# Altium PCB 电磁阀驱动板 V0.1.PcbDoc
Units mil, origin at the board's own origin, x right, y up, seen from the top; angles counter-clockwise.
Board outline 2165.35 x 2165 mil, 2 copper layers (Top Layer, Bottom Layer); 70 components, 47 nets, 188 pads, 19 vias.
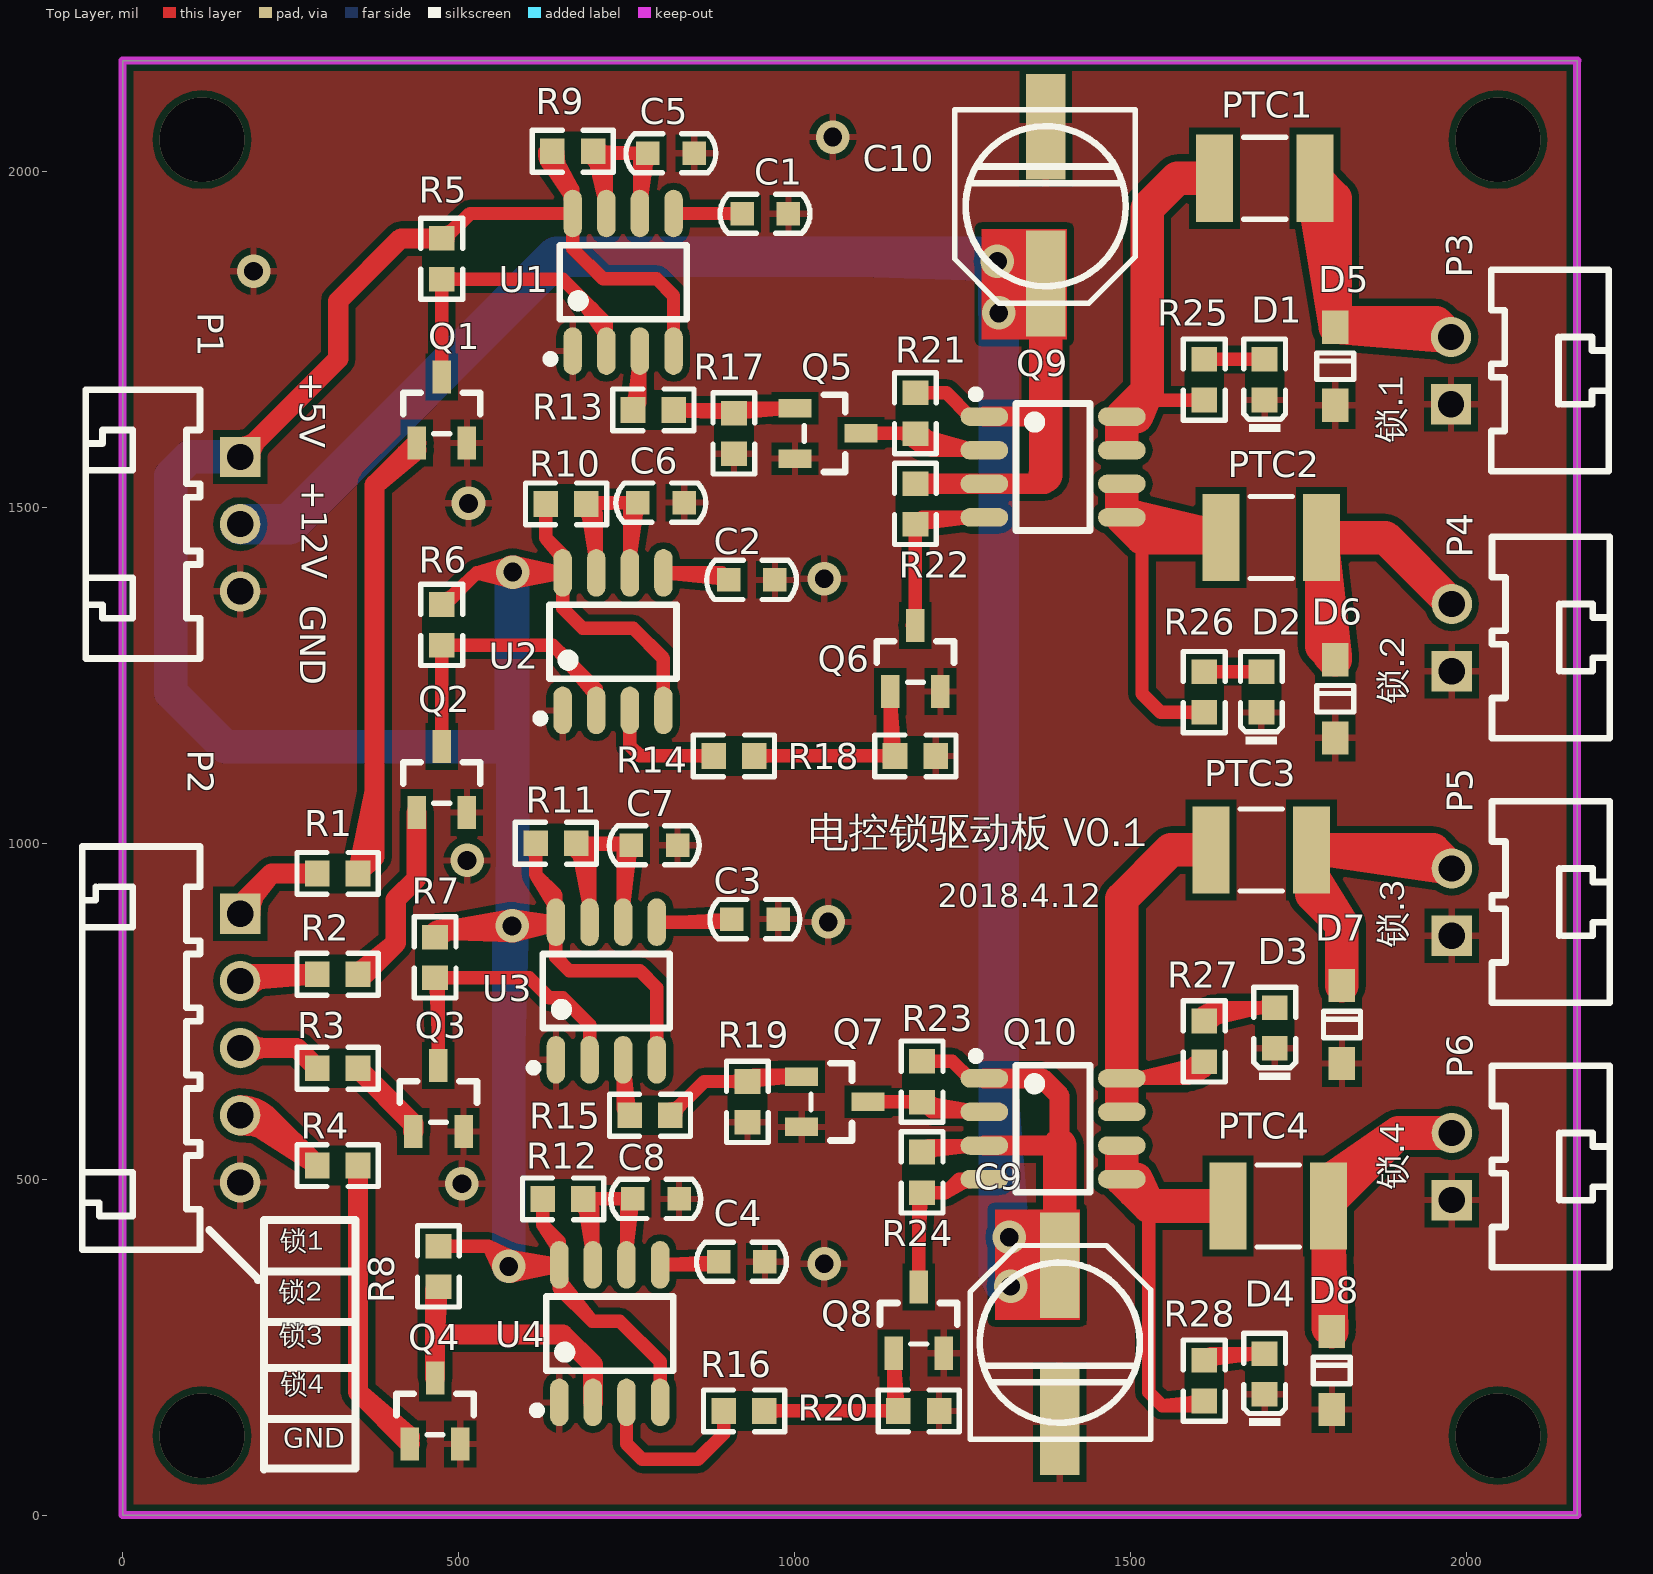
[diagram p0: Top Layer view]
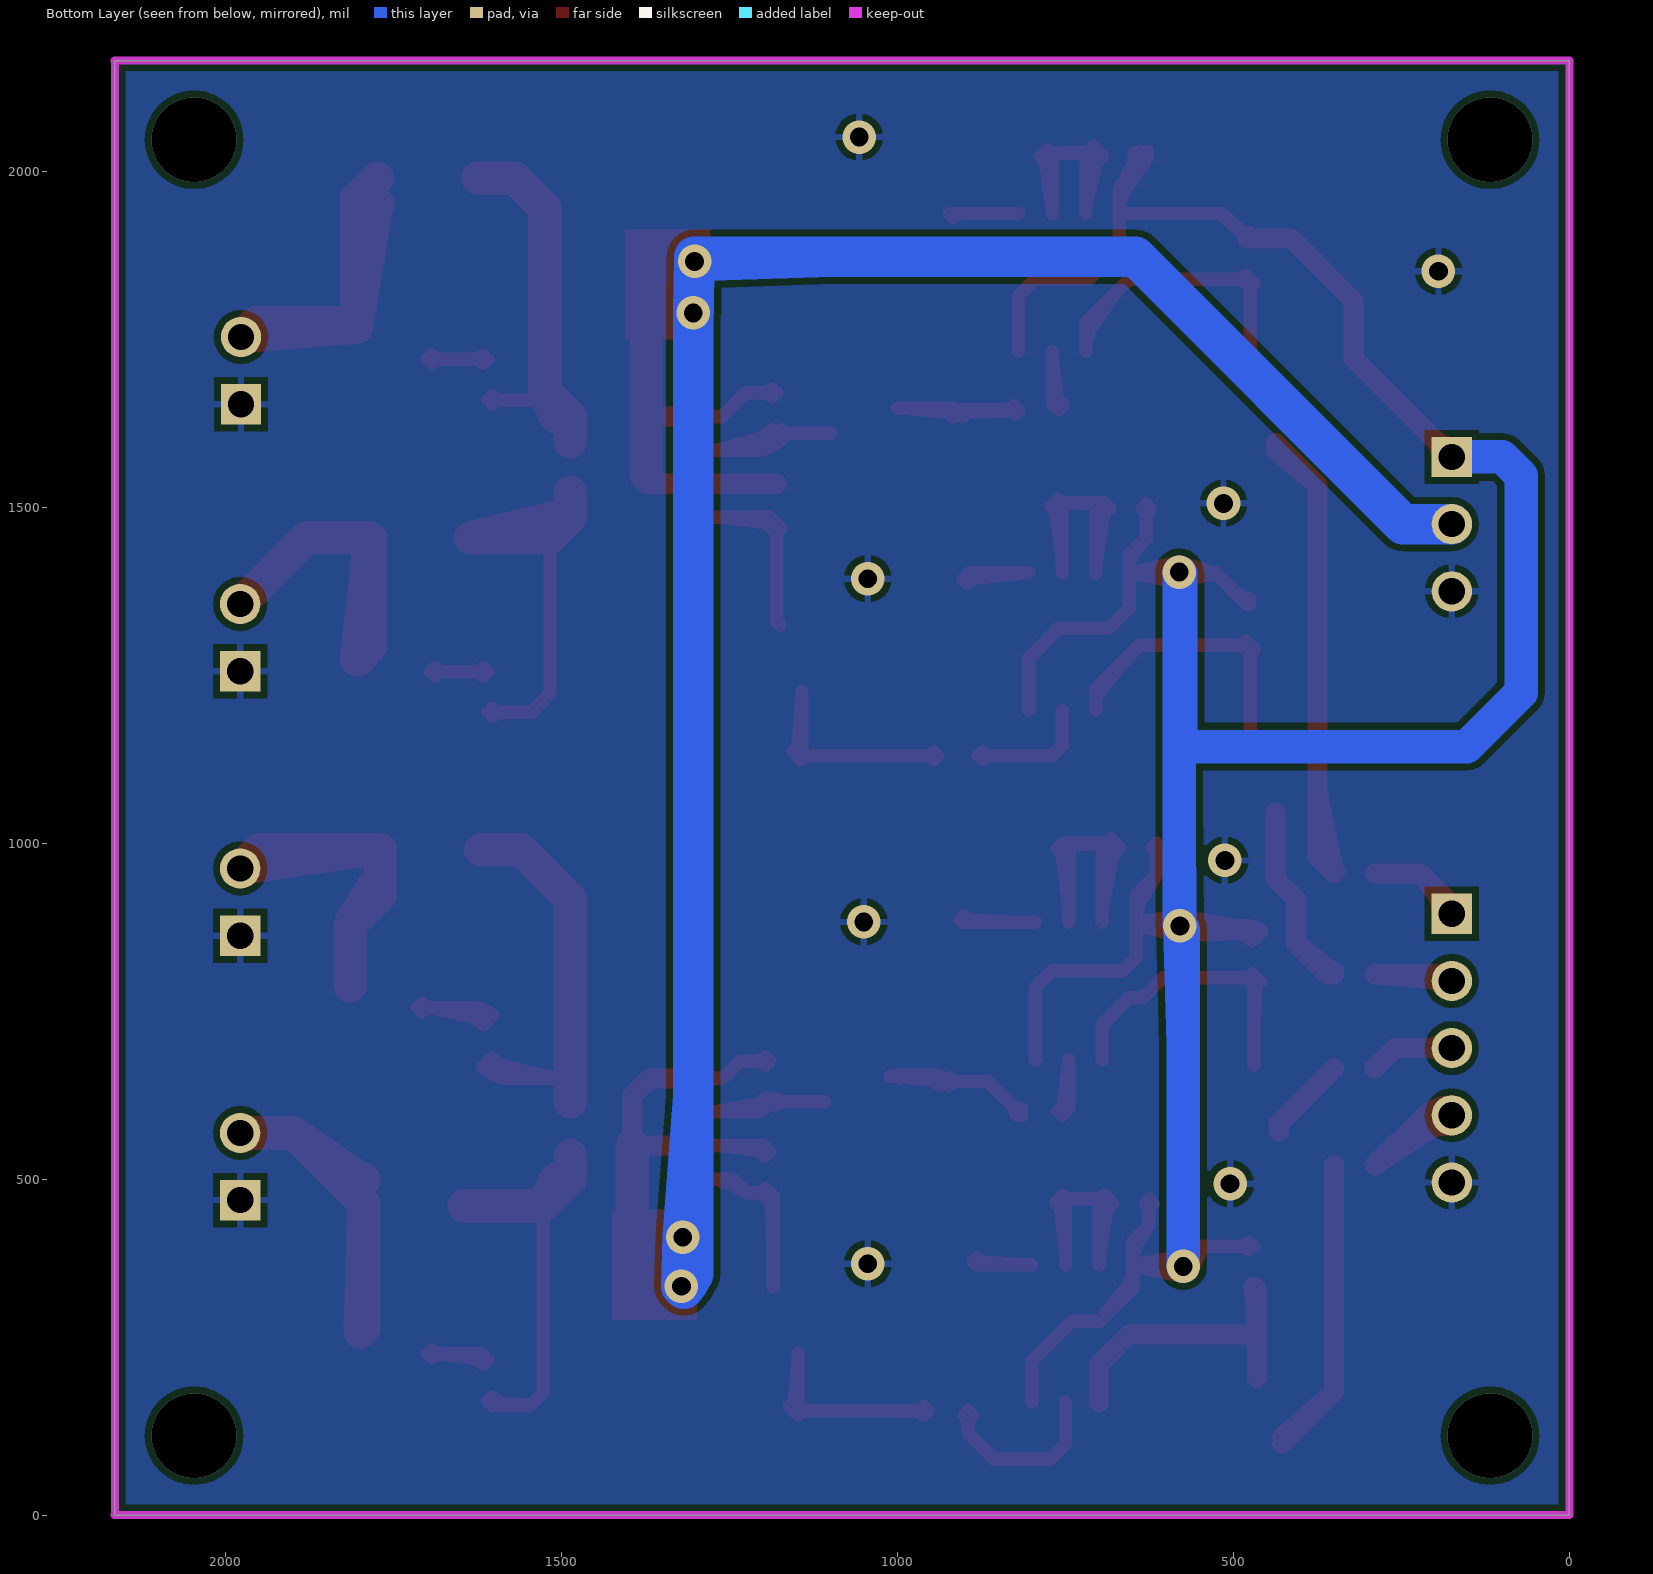
[diagram p1: Bottom Layer view, seen from below]
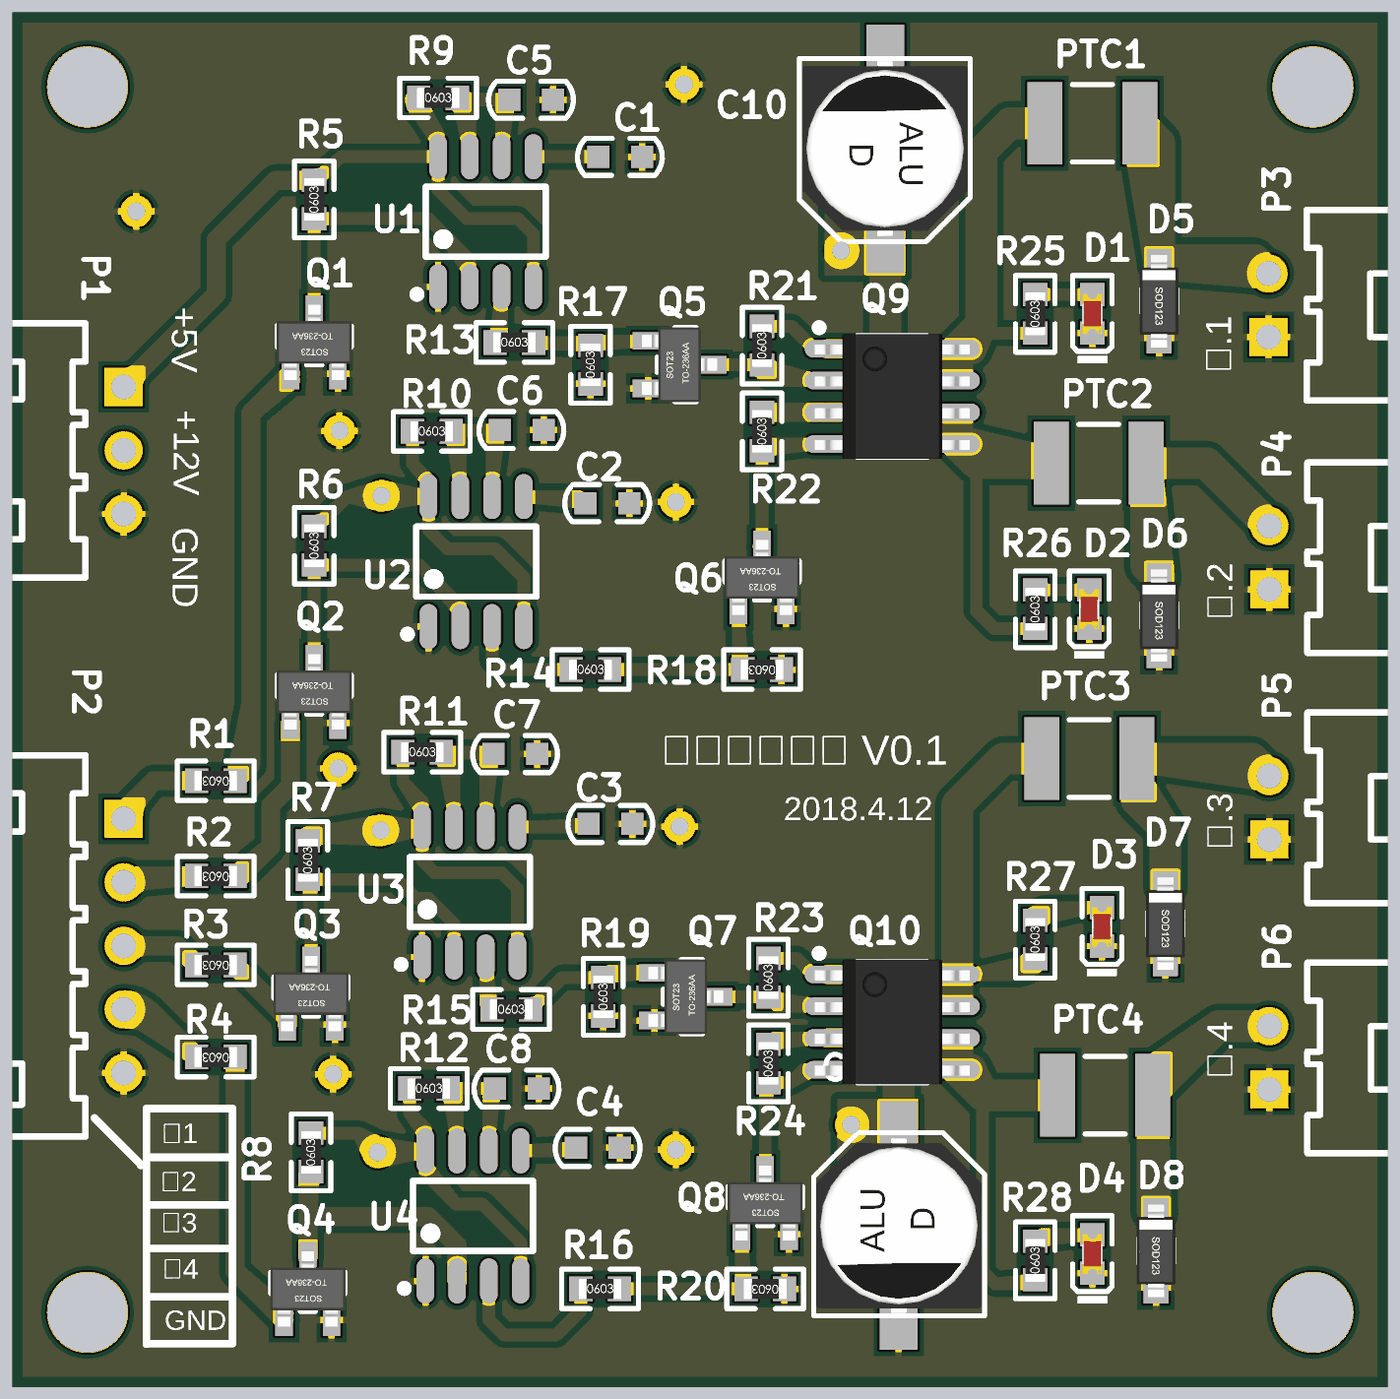
[diagram p2: 3D render of the assembled board from above, using the file's embedded part models]

## Layer stack, top to bottom
Top Layer: signal copper 1.4
Dielectric: dielectric 12.6, FR-4, Dk 4.8
Bottom Layer: signal copper 1.4

## Board outline
0,2165 2165,2165 2165,0.35 2165.35,0 0,0

## Design rules (kind name [scope] priority, off if disabled: settings)
Clearance [All] p1: gap=10
PolygonConnect [All] p1: connectstyle=Relief reliefconductorwidth=10 reliefentries=4 polygonreliefangle="90 Angle"
RoomDefinition 电磁阀驱动 [InComponentClass('电磁阀驱动')] p1: confinementstyle=ConfineIn formatcopy=TRUE outline 0,0 2165,0 2165,2165 0,2165
RoutingVias [All] p1: holewidth=28 width=50 viastyle="Through Hole" minholewidth=28 minwidth=50 maxholewidth=28 maxwidth=50
SilkscreenOverComponentPads [All] p1: minsilkscreentomaskgap=10
SolderMaskExpansion [All] p1: expansion=4
Width [All] p1: maxlimit=1000 minlimit=10 preferedwidth=10
27 further rules are at their usual default settings.

## Components (designator, comment, footprint, x,y, rotation, side; value= is the part's Value field where it differs from the comment)
C1 "Cap" 0603C 955,1935 r180 top
C2 "Cap" 0603C 935,1390 r180 top
C3 "Cap" 0603C 940,885 r180 top
C4 "Cap" 0603C 920,375 r180 top
C5 "Cap" 0603C 815,2025 r180 top
C6 "Cap" 0603C 800,1505 r180 top
C7 "Cap" 0603C 790,995 r180 top
C8 "Cap" 0603C 792.32,468.5 r180 top
C9 "47uF 25v" CAP_SMD_6*7 1395,255 r0 top
C10 "47uF 25v" CAP_SMD_6*7 1374.02,1949.8 r180 top
D1 "绿灯 0603" 0603_LED_S1 1700,1690 r90 top
D2 "绿灯 0603" 0603_LED_S1 1695,1225 r90 top
D3 "绿灯 0603" 0603_LED_S1 1715,725 r90 top
D4 "绿灯 0603" 0603_LED_S1 1700,210 r90 top
D5 "B5819W  SL" SOD-123 1805,1710 r270 top
D6 "B5819W  SL" SOD-123 1805,1215 r270 top
D7 "B5819W  SL" SOD-123 1815,730 r270 top
D8 "B5819W  SL" SOD-123 1800,215 r270 top
P1 "Header 3" sip-3 175,1575 r270 top
P2 "Header 5" SIP-5 175,895 r270 top
P3 "Header 2" SIP-2 1977.36,1653.54 r90 top
P4 "Header 2" SIP-2 1978.5,1256.1 r90 top
P5 "Header 2" SIP-2 1978.5,862.4 r90 top
P6 "Header 2" SIP-2 1978.5,468.7 r90 top
PTC1 "SMD1812P300TF/16" 1812 1700,1990 r0 top
PTC2 "SMD1812P300TF/16" 1812 1710,1455 r0 top
PTC3 "SMD1812P300TF/16" 1812 1695,990 r0 top
PTC4 "SMD1812P300TF/16" 1812 1720,460 r0 top
Q1 "SS8050 Y1" SOT-23(SOT-23-3) 475,1645 r270 top
Q2 "SS8050 Y1" SOT-23(SOT-23-3) 475,1095 r270 top
Q3 "SS8050 Y1" SOT-23(SOT-23-3) 470,620 r270 top locked
Q4 "SS8050 Y1" SOT-23(SOT-23-3) 465,155 r270 top
Q5 "SS8050 Y1" SOT-23(SOT-23-3) 1050,1610 r180 top
Q6 "SS8050 Y1" SOT-23(SOT-23-3) 1180,1275 r270 top
Q7 "SS8050 Y1" SOT-23(SOT-23-3) 1060,615 r180 top
Q8 "SS8050 Y1" SOT-23(SOT-23-3) 1185,290 r270 top
Q9 "AO4803A" SOP-8_150mil 1385,1560 r270 top
Q10 "AO4803A" SOP-8_150mil 1385,575 r270 top
R1 "100Ω  ±1%" 0603_R 320,955 r180 top locked
R2 "100Ω  ±1%" 0603_R 320,805 r180 top locked
R3 "100Ω  ±1%" 0603_R 320,665 r180 top locked
R4 "100Ω  ±1%" 0603_R 320,520 r180 top locked
R5 "10KΩ (102) ±1%" 0603_R 475,1870 r90 top
R6 "10KΩ (102) ±1%" 0603_R 475,1325 r90 top
R7 "10KΩ (102) ±1%" 0603_R 465,830 r90 top
R8 "10KΩ (102) ±1%" 0603_R 470,370 r90 top
R9 "3KΩ (3001) ±1%" 0603_R 670,2030 r0 top locked
R10 "3KΩ (3001) ±1%" 0603_R 660,1505 r0 top locked
R11 "3KΩ (3001) ±1%" 0603_R 645,1000 r0 top locked
R12 "3KΩ (3001) ±1%" 0603_R 655.51,470.47 r0 top
R13 "3KΩ (3001) ±1%" 0603_R 790,1645 r0 top
R14 "3KΩ (3001) ±1%" 0603_R 910,1130 r0 top
R15 "3KΩ (3001) ±1%" 0603_R 785,595 r0 top
R16 "3KΩ (3001) ±1%" 0603_R 925,155 r0 top
R17 "10KΩ (102) ±1%" 0603_R 910,1610 r90 top
R18 "10KΩ (102) ±1%" 0603_R 1180,1130 r180 top
R19 "10KΩ (102) ±1%" 0603_R 930,615 r90 top
R20 "10KΩ (102) ±1%" 0603_R 1185,155 r180 top
R21 "10KΩ (102) ±1%" 0603_R 1180,1640 r90 top
R22 "10KΩ (102) ±1%" 0603_R 1180,1505 r90 top
R23 "10KΩ (102) ±1%" 0603_R 1190,645 r90 top
R24 "10KΩ (102) ±1%" 0603_R 1190,510 r90 top
R25 "3KΩ (3001) ±1%" 0603_R 1610,1690 r90 top
R26 "3KΩ (3001) ±1%" 0603_R 1610,1225 r90 top
R27 "3KΩ (3001) ±1%" 0603_R 1610,705 r90 top
R28 "3KΩ (3001) ±1%" 0603_R 1610,200 r90 top
U1 "NE555DR" SOIC-8_150mil 745,1835 r0 top
U2 "NE555DR" SOIC-8_150mil 730,1300 r0 top
U3 "NE555DR" SOIC-8_150mil 720,780 r0 top
U4 "NE555DR" SOIC-8_150mil 725,270 r0 top

## Footprints (in the part's own frame and the unit in brackets; to place one, negate y for a bottom-side part, rotate by r counter-clockwise, add the part's x,y. Pads: shape width x height; smd on the part's side, far side on the other; paste and mask are expansions set on the pad)
0603_LED_S1 [mm]
  rect 0.93x0.98 smd: A(0.77,0) K(-0.77,0)
  silkscreen extent -1.98,-0.79 1.54,0.79, body extent -0.8,-0.4 0.8,0.4, height 0.6
0603_R [mm]
  rect 0.93x0.98 smd: 1(-0.77,0) 2(0.77,0)
  silkscreen extent -1.53,-0.79 1.54,0.79, body extent -0.85,-0.4 0.85,0.4, height 0.56
0603C [mil]
  rect 35x35 smd: 1(-36,-2) 2(33,-2)
  silkscreen extent -68,-31 66,27
1812 [mm] "Chip Capacitor, Body 4.5x3.2mm"
  rect 1.4x3.3 smd: 1(-1.9,0) 2(1.9,0)
  silkscreen extent -0.8,-1.55 0.8,1.55, body extent -2.4,-1.7 2.4,1.7, height 1.4
CAP_SMD_6*7 [mm]
  rect 1.5x4 smd: 1(0,2.965) 2(0,-2.965)
  silkscreen extent -3.39,-3.61 3.44,3.71, body extent -3.29,-3.51 3.31,3.49, height 5.4
SIP-2 [mil]
  rect 60x60 hole 39: 1(0,0)
  round 60 hole 39: 2(100,0)
  silkscreen extent -100,-235 200,-60
sip-3 [mil]
  rect 60x60 hole 39: 1(0,0)
  round 60 hole 39: 2(100,0) 3(200,0)
  silkscreen extent -100,-230 300,-60
SIP-5 [mil]
  rect 60x60 hole 39: 1(0,0)
  round 60 hole 39: 2(100,0) 3(200,0) 4(300,0) 5(400,0)
  silkscreen extent -100,-235 500,-60
SOD-123 [mm]
  rect 1.25x1 smd: 1(1.475,0) 2(-1.475,0)
  silkscreen extent -0.5,-0.7 0.5,0.7, body extent -1.85,-0.77 1.85,0.78, height 1.35
SOIC-8_150mil [mm]
  oval 0.7x1.8 smd: 1(-1.905,-2.6) 2(-0.635,-2.6) 3(0.635,-2.6) 4(1.905,-2.6) 5(1.905,2.6) 6(0.635,2.6) 7(-0.635,2.6) 8(-1.905,2.6)
  silkscreen extent -2.9,-3.05 2.4,1.4
SOP-8_150mil [mm]
  oval 0.7x1.8 smd: 1(-1.905,-2.6) 2(-0.635,-2.6) 3(0.635,-2.6) 4(1.905,-2.6) 5(1.905,2.6) 6(0.635,2.6) 7(-0.635,2.6) 8(-1.905,2.6)
  silkscreen extent -2.9,-3.07 2.4,1.4, body extent -2.5,-3.1 2.5,3.1, height 1.75
SOT-23(SOT-23-3) [mm]
  rect 1.25x0.7 smd: 1(1.25,-0.95) 2(1.25,0.95) 3(-1.25,0)
  silkscreen extent -0.65,-1.46 0.9,1.46, body extent -1.5,-1.5 1.5,1.5, height 1.3

## Part data
C1 C2 C3 C4 C5 C6 C7 C8: "C"
C9 C10: library part "Cap Pol1", "Polarized Capacitor (Radial)"
D1 D2 D3 D4: library part 060
D5 D6 D7 D8: library part "SOD-123 B5819W  SL"
P1 P2 P3 P4 P5 P6: "Heade"
PTC1 PTC2 PTC3 PTC4: library part "0603 3KΩ (3001) 1%", "贴片电阻"
Q1 Q2 Q3 Q4 Q5 Q6 Q7 Q8: library part "SOT-23 SS805"
Q9 Q10: library part APM4953KC-TRG, "M"
R1 R2 R3 R4 R5 R6 R7 R8 R9 R10 R11 R12 R13 R14 R15 R16 R17 R18 R19 R20 R21 R22 R23 R24 R25 R26 R27 R28: library part "0603 3KΩ (300"
U1 U2 U3 U4: library part NE555DR_[C7

## Via types
v1: diameter 50, hole 28, Top Layer to Bottom Layer, 14 vias
v2: diameter 125.98, hole 125.98, Top Layer to Bottom Layer, 4 vias
v3: diameter 50, hole 28, Top Layer to Bottom Layer, tented top, 1 vias

## Nets (pads, with @x,y where several pads share a name; then routed paths per layer and width w, separated by ;. In a path a pad name is that pad's centre, name@x,y a point inside that pad or via, vN(x,y) a via of type N, cw(c..) or ccw(c..) an arc to the next point about the centre after c; other vN are vias at no path point)
GND: C1.1 C2.1 C3.1 C4.1 C5.1 C6.1 C7.1 C8.1 C9.2 C10.2 D1.K D2.K D3.K D4.K D5.1 D6.1 D7.1 D8.1 P1.3 P2.5 P3.1 P4.1 P5.1 P6.1 Q1.2 Q2.2 Q3.2 Q4.2 Q5.2 Q6.2 Q7.2 Q8.2 R17.1 R18.1 R19.1 R20.1 U1.1 U2.1 U3.1 U4.1
  other v1: 1044.29,374.02 504.92,493.11 1050.2,882.87 512.8,974.41 1044.29,1393.7 514.76,1505.91 194.88,1851.38 1057.09,2051.18
NetC1_2: C1.2 U1.5 | length 194.8
  Top Layer w20: U1.5 921.64,1937.36 C1.2 844.5,1937.36 ; 903.02,1937.36 cw(c903.02,1918.02) C1.2@916.7,1931.7
NetC2_2: C2.2 U2.5 | length 345.6
  Top Layer w20: 858.88,1402.36 cw(c858.88,1348.88) C2.2@896.7,1386.7 ; 872.72,1400.54 C2.2 ; 878.73,1394.96 U2.5 ; U2.5 820.54,1402.36 C2.2 ; U2.5 891.64,1402.36 C2.2
NetC3_2: C3.2 U3.5 | length 239.6
  Top Layer w20: U3.5 902.36,882.36 C3.2 ; 828.92,882.36 C3.2 ; 877.7,882.36 ccw(c877.7,916.3) C3.2@901.7,892.3 ; 886.48,883.52 C3.2
NetC4_2: C4.2 U4.5 | length 288.4
  Top Layer w20: U4.5@808.98,372.36 C4.2 ; 857.7,372.36 ccw(c857.7,406.3) C4.2@881.7,382.3 ; 866.48,373.52 C4.2 ; C4.2@873.72,376.21 U4.5 882.36,372.36 C4.2
NetC5_2: C5.2 R9.2 U1.6 U1.7 | length 1197.8
  Top Layer w20: R9.2@694.44,2023.14 cw(c632.74,1961.44) U1.7@720,1961.44 ; R9.2@700.32,2020.71 cw(c700.32,1998.28) R9.2@716.18,2014.14 ; R9.2@706.19,2034.89 ccw(c725.24,2053.94) 725.24,2027 ; 708.31,2005.07 U1.7@720,1959.02 ; R9.2@708.62,2029.02 ccw(c726.3,2029.02) R9.2@713.8,2016.51 ; R9.2@708.58,2037.28 cw(c681.02,2009.72) 720,2009.72 ; 717.03,1984.02 R9.2@700.32,2029.02 ; 718.67,2019.81 R9.2@700.32,2029.02 ; U1.7 720,2010.32 ; U1.7@720,1945.2 R9.2@700.32,2029.02 ; U1.6 C5.2@770,2015 ; U1.6@770,1943.89 C5.2 ; 770,1979.92 cw(c829.08,1979.92) C5.2@787.3,2021.7 ; 772.01,1995.21 C5.2 ; C5.2@776.7,2021.7 ccw(c763.89,2008.89) 763.89,2027 ccw(c763.89,2045.11) C5.2@776.7,2032.3 ; C5.2@778.8,2027 R9.2@700.32,2029.02 ; R9.2@700.32,2029.02 U1.7@720,1959.02 ; R9.2@700.32,2029.02 720,2010.32 ; R9.2@700.32,2029.02 720,2010.32 ; U1.7@720,1959.02 720,2010.32 ; 720,2010.32 703.32,2027 C5.2 ; C5.2@770,2015 770,1959.02 C5.2 ; C5.2@770,2015 C5.2
NetC6_2: C6.2 R10.2 U2.6 U2.7 | length 1051.8
  Top Layer w20: R10.2@684.44,1498.14 cw(c634.81,1448.51) 705,1448.51 ; R10.2@691.46,1497.29 705,1424.02 R10.2@705,1490.32 ; R10.2@696.19,1500.11 cw(c712.82,1483.48) 712.82,1507 ; 702.61,1466.68 690.32,1504.02 U2.7@705,1417.53 ; U2.7 R10.2@705,1490.32 ; U2.6 C6.2@755,1495 ; U2.6@755,1423.59 C6.2 ; 755,1459.92 cw(c814.08,1459.92) C6.2@772.3,1501.7 ; 757.01,1475.21 C6.2 ; C6.2@761.7,1501.7 ccw(c748.89,1488.89) 748.89,1507 ccw(c748.89,1525.11) C6.2@761.7,1512.3 ; C6.2@765.65,1497.6 755,1424.02 C6.2@755,1495 ; R10.2 C6.2 ; R10.2 R10.2@705,1490.32 ; R10.2 692.32,1507 C6.2 ; C6.2@755,1495 C6.2
NetC7_2: C7.2 R11.2 U3.6 U3.7 | length 1360.3
  Top Layer w20: R11.2@669.44,993.14 cw(c607.74,931.44) 695,931.44 ; R11.2@675.32,990.71 cw(c675.32,968.28) R11.2@691.18,984.14 ; R11.2@679.31,1000 C7.2 ; 679.83,979.66 695,904.02 695,977.8 ; R11.2@681.19,994.13 cw(c695.37,979.94) 695.37,1000 cw(c695.37,1020.06) R11.2@681.19,1005.87 ; R11.2@683.62,999.02 ccw(c701.3,999.02) R11.2@688.8,986.51 ; R11.2@683.58,1007.28 cw(c656.02,979.72) 695,979.72 ; 692.03,954.02 R11.2@675.32,999.02 ; 693.67,989.81 R11.2@675.32,999.02 ; U3.7 695,980.32 ; U3.7@695,914.64 R11.2@675.32,999.02 ; 731.65,1000 cw(c731.65,971.65) C7.2@751.7,991.7 ; 738.99,999.03 C7.2 ; U3.6 745,985 C7.2 ; U3.6@745,913.44 C7.2 ; 745,949.92 cw(c804.08,949.92) C7.2@762.3,991.7 ; 745,977.8 745,904.02 754.34,978.49 ; 747.01,965.21 C7.2 ; C7.2@753.58,997.13 R11.2@675.32,999.02 ; R11.2@675.32,999.02 695,980.32 ; R11.2@675.32,999.02 695,980.32 ; 695,980.32 R11.2 754,1000 C7.2
NetC8_2: C8.2 R12.2 U4.6 U4.7 | length 1019
  Top Layer w20: R12.2@679.95,463.61 cw(c631.55,415.22) 700,415.22 ; R12.2@685.86,470.5 C8.2 ; R12.2@686.2,467.21 700,394.02 R12.2@700,456.3 ; R12.2@691.7,464.6 cw(c705.96,450.34) 705.96,470.5 ; R12.2@691.7,476.35 ccw(c705.81,490.45) 705.81,470.5 ; 697.67,432.93 685.83,469.49 U4.7@700,383.82 ; U4.7 R12.2@700,456.3 ; U4.6 C8.2@750,461.18 ; U4.6@750,389.98 C8.2 ; 750,429.89 cw(c799.94,429.89) C8.2@764.63,465.2 ; 751.7,442.81 C8.2 ; C8.2@754.02,465.2 ccw(c741.22,452.4) 741.22,470.5 ccw(c741.22,488.61) C8.2@754.02,475.81 ; C8.2@758.99,467.59 750,394.02 C8.2@750,461.18 ; R12.2@700,456.3 R12.2 C8.2 ; C8.2@750,461.18 C8.2
NetD1_A: D1.A R25.2 | length 387.9
  Top Layer w20: R25.2 D1.A ; R25.2@1616.86,1714.44 cw(c1631.04,1700.26) 1631.04,1720.32 cw(c1631.04,1740.37) R25.2@1616.86,1726.19 ; R25.2@1620.71,1720.32 D1.A@1699.02,1720.32 ; D1.A@1693.14,1714.44 ccw(c1678.96,1700.26) 1678.96,1720.32 ccw(c1678.96,1740.37) D1.A@1693.14,1726.19 ; R25.2@1610.98,1720.32 1689.29,1720.32 R25.2@1610.98,1720.32
NetD2_A: D2.A R26.2 | length 382.9
  Top Layer w20: R26.2 D2.A ; R26.2@1615.71,1255.32 D2.A@1694.02,1255.32 ; R26.2@1616.86,1249.44 cw(c1631.04,1235.26) 1631.04,1255.32 cw(c1631.04,1275.37) R26.2@1616.86,1261.19 ; D2.A@1688.14,1249.44 ccw(c1673.96,1235.26) 1673.96,1255.32 ccw(c1673.96,1275.37) D2.A@1688.14,1261.19 ; R26.2@1610.98,1255.32 1689.29,1255.32 R26.2@1610.98,1255.32
NetD3_A: D3.A R27.2 | length 685.2
  Top Layer w20: R27.2@1602.72,743.58 cw(c1631.04,715.26) 1631.04,755.32 ; R27.2 1630,755.32 ; R27.2@1610.98,743.62 ccw(c1610.98,761.3) R27.2@1623.49,748.8 ; R27.2@1616.86,729.44 cw(c1679.32,666.98) 1679.32,755.32 ; R27.2@1619.29,735.32 cw(c1641.72,735.32) R27.2@1625.86,751.18 ; 1620.67,753.95 R27.2@1610.98,735.32 ; 1656.46,752.3 R27.2@1610.98,735.32 ; D3.A@1708.14,749.44 ccw(c1693.96,735.26) 1693.96,755.32 ccw(c1693.96,775.37) D3.A@1708.14,761.19 ; D3.A@1714.02,755.32 1635.71,755.32 R27.2@1610.98,735.32 ; D3.A 1630,755.32 ; R27.2@1610.98,735.32 1695.25,755.32 R27.2@1610.98,735.32 ; R27.2@1610.98,735.32 1630,755.32 ; R27.2@1610.98,735.32 1630,755.32
NetD4_A: D4.A R28.2 | length 441.5
  Top Layer w20: R28.2 1620,240.32 D4.A ; R28.2@1616.86,224.44 cw(c1655.18,186.12) 1655.18,240.32 ; R28.2@1620.71,240.32 D4.A@1699.02,240.32 ; 1641.15,238.47 R28.2@1610.98,230.32 ; D4.A@1692.17,240.32 R28.2@1610.98,230.32 ; D4.A@1692.33,240.32 R28.2@1610.98,230.32 ; D4.A@1693.14,234.44 ccw(c1678.96,220.26) 1678.96,240.32 ccw(c1678.96,260.37) D4.A@1693.14,246.19
NetD5_2: D5.2 P3.2 PTC1.2 | length 1797.6
  Top Layer w50: PTC1.2@1772.99,1950.79 cw(c1695.72,1873.52) 1805,1873.52 ; PTC1.2 1805,1959.8 ; 1801.28,1901.8 PTC1.2@1774.8,1952.6 ; D5.2@1805,1771.62 PTC1.2@1774.8,1952.6 ; 1913.49,1775 cw(c1913.49,1689.67) P3.2@1973.83,1750.01 ; 1935.57,1772.09 P3.2 ; P3.2@1980,1750 1955,1775 ; PTC1.2@1774.8,1952.6 1805,1772.99 1805,1942.68 PTC1.2@1774.8,1952.6 ; PTC1.2@1774.8,1952.6 1805,1959.8 ; PTC1.2@1774.8,1952.6 1805,1959.8 ; D5.2 P3.2 ; D5.2 1955,1775 ; D5.2 D5.2@1811.93,1775 ; D5.2 1805,1959.8 ; D5.2@1811.93,1775 P3.2 ; D5.2@1811.93,1775 1955,1775
NetD6_2: D6.2 P4.2 PTC2.2 | length 989.6
  Top Layer w50: 1784.8,1313.92 ccw(c1840.93,1313.92) D6.2@1801.24,1274.23 ; PTC2.2@1784.8,1453.25 D6.2@1805,1277.99 ; 1786.72,1299.39 D6.2@1805,1277.99 ; D6.2 1784.8,1293.27 ; P4.2 1879.61,1455 PTC2.2 1784.8,1293.27 ; 1784.8,1293.27 1784.8,1417.6 D6.2@1805,1277.99 ; 1784.8,1293.27 D6.2@1805,1277.99 ; 1784.8,1293.27 D6.2@1805,1277.99
NetD7_2: D7.2 P5.2 PTC3.2 | length 1098.8
  Top Layer w50: PTC3.2@1772.36,952.6 ccw(c1847.35,952.6) 1794.33,899.57 ; 1782.41,915.1 PTC3.2@1769.8,952.6 ; PTC3.2@1790.31,990 P5.2 ; D7.2 1815,878.9 ; D7.2@1815,792.99 1815,878.9 ; 1899.8,990 cw(c1899.8,883.7) P5.2@1974.97,958.87 ; 1927.32,986.38 P5.2 ; 1769.8,924.09 PTC3.2@1769.8,952.6 ; 1769.8,924.09 PTC3.2@1769.8,952.6 ; 1769.8,924.09 1815,878.9 ; 1769.8,924.09 PTC3.2 1950.91,990 P5.2 ; PTC3.2@1769.8,952.6 1815,878.9
NetD8_2: D8.2 P6.2 PTC4.2 | length 1117.3
  Top Layer w50: PTC4.2@1794.8,448.19 1800,277.99 1794.8,422.6 D8.2@1794.8,278.27 ; PTC4.2@1794.8,499.96 ccw(c1794.8,584.84) 1854.82,524.82 ; D8.2 D8.2@1794.8,278.27 ; 1837.24,511.33 1794.8,497.4 1898.7,568.7 ; P6.2 1898.7,568.7 ; D8.2@1794.8,278.27 PTC4.2 1794.8,464.8 1898.7,568.7
NetP2_1: P2.1 R1.2 | length 318.8
  Top Layer w30: P2.1@190,895 cw(c258.24,895) 209.99,943.26 ; 199.14,929.12 P2.1 ; R1.2 221.73,955 ; P2.1 221.73,955 ; P2.1 175,908.27 221.73,955
NetP2_2: P2.2 R2.2 | length 332
  Top Layer w30: P2.2@185.61,784.39 cw(c235.36,734.64) 235.36,805 ; 217.15,802.6 P2.2 ; P2.2 R2.2 185,805 P2.2
NetP2_3: P2.3 R3.2 | length 225.7
  Top Layer w30: P2.3 259.68,695 ; P2.3@185.61,684.39 cw(c211.21,658.79) 211.21,695 cw(c211.21,731.21) P2.3@185.61,705.61 ; R3.2 259.68,695 ; R3.2@289.68,665.98 259.68,695
NetP2_4: P2.4 R4.2 | length 878.8
  Top Layer w30: P2.4@175,580 cw(c175,447.98) 268.35,541.33 ; P2.4@175,610 cw(c175,550.41) 217.14,592.55 ; P2.4@185.61,584.39 cw(c211.21,558.79) 211.21,595 cw(c211.21,631.21) P2.4@185.61,605.61 ; 241.01,562.31 P2.4 ; R4.2@287.3,522.39 P2.4 ; R4.2@287.55,523.09 P2.4 ; R4.2 214.68,595 ; R4.2@289.68,520.98 214.68,595 ; P2.4 214.68,595 ; P2.4 214.68,595 ; P2.4 214.68,595
NetPTC1_1: PTC1.1 Q9.7 Q9.8 R25.1 | length 895.8
  Top Layer w20: Q9.8 1512.05,1659.69 ; Q9.8@1497.25,1623.84 cw(c1508.34,1634.36) Q9.8@1497.53,1645.17 ; Q9.8@1509.02,1635 1512.05,1659.69 ; Q9.8@1511.76,1637.6 cw(c1523.24,1648.49) 1512.05,1659.68 ; 1530.71,1659.69 R25.1@1609.02,1659.69 ; R25.1@1603.14,1653.81 ccw(c1588.96,1639.63) 1588.96,1659.69 ccw(c1588.96,1679.74) R25.1@1603.14,1665.56 ; R25.1 1512.05,1659.69
  Top Layer w50: Q9.8@1497.8,1635 cw(c1522.98,1635) 1505.17,1652.81 ; Q9.8@1509.02,1635 1525,1672.64 ; PTC1.1 1570,1990 1525,1945 1525,1672.64 ; Q9.8 1487.36,1597.44 Q9.8 ; Q9.8 1525,1672.64
NetPTC2_1: PTC2.1 Q9.5 Q9.6 R26.1 | length 938.3
  Top Layer w20: 1517.36,1455 1517.36,1222.64 1545.31,1194.69 ; R26.1@1603.14,1188.81 ccw(c1588.96,1174.63) 1588.96,1194.69 ccw(c1588.96,1214.74) R26.1@1603.14,1200.56 ; R26.1@1609.02,1194.69 1545.31,1194.69 ; R26.1 1545.31,1194.69
  Top Layer w50: Q9.6@1487.36,1522.64 Q9.5 1517.36,1455 ; Q9.5@1497.8,1485 ccw(c1522.98,1485) 1505.17,1467.19 ; Q9.5@1501.08,1477.07 ccw(c1554.35,1530.34) 1554.35,1455 ; 1534.85,1457.57 Q9.5@1509.02,1485 ; Q9.5@1509.02,1485 1517.36,1455 ; Q9.5@1509.02,1485 1517.36,1455 ; Q9.5@1509.02,1485 PTC2.1 1517.36,1455
NetPTC3_1: PTC3.1 Q10.7 Q10.8 R27.1 | length 1153.2
  Top Layer w20: Q10.8 1585.31,650 ; Q10.8@1521.63,650 R27.1@1609.02,674.69 ; 1529.37,650 ccw(c1529.37,754.34) R27.1@1603.14,680.56 ; 1556.37,653.55 R27.1@1609.02,674.69 ; 1577.65,650 ccw(c1577.65,706.05) R27.1@1617.28,666.42 ; 1582.8,650 1509.02,650 1586.38,668.29 ; 1592.16,651.91 R27.1@1609.02,674.69 ; R27.1@1594.14,658.82 ccw(c1578.28,674.69) R27.1@1600.71,674.69 ; R27.1@1596.51,661.2 cw(c1609.02,648.7) R27.1@1609.02,666.38 ; R27.1 1585.31,650 ; 1585.31,650 R27.1@1609.02,674.69 ; 1585.31,650 R27.1@1609.02,674.69
  Top Layer w50: 1487.36,615 Q10.8 1487.36,917.36 1560,990 PTC3.1
NetPTC4_1: PTC4.1 Q10.5 Q10.6 R28.1 | length 802.3
  Top Layer w20: 1527.36,460 1527.36,182.64 1547.36,162.64 ; 1571.95,162.64 ccw(c1571.95,206.75) R28.1@1603.14,175.56 ; 1583.37,164.14 1609.02,169.69 1547.36,162.64 ; R28.1 1602.95,162.64 1547.36,162.64
  Top Layer w50: Q10.5@1497.8,500 ccw(c1522.98,500) 1505.17,482.19 ; Q10.5@1509.02,500 1527.36,460 ; PTC4.1 1527.36,460 ; Q10.5 1487.36,535 Q10.5 ; Q10.5 1527.36,460
NetQ1_1: Q1.1 R1.1 | length 1088.2
  Top Layer w30: R1.1@347.98,958.32 ccw(c282.74,1023.56) 375,1023.56 ; R1.1 375,979.69 ; 371.86,999.68 R1.1@350.31,955.98 ; 375,1075.68 R1.1@350.31,955.98 ; 421.2,1579.39 cw(c437.6,1562.99) Q1.1@437.6,1586.18 ; Q1.1@437.6,1584.96 375,1533.19 ; Q1.1 375,1533.19 ; R1.1@350.31,955.98 375,979.69 ; R1.1@350.31,955.98 375,979.69 ; 375,979.69 375,1533.19
NetQ1_3: Q1.3 R5.1 U1.2 | length 950.8
  Top Layer w20: R5.1@469.13,1833.81 cw(c454.94,1819.63) 475,1819.63 cw(c495.05,1819.63) R5.1@480.87,1833.81 ; Q1.3 475,1834.69 480,1839.69 655.31,1839.69 720,1775 ; Q1.3@475,1705.04 475,1778.82 ; 475,1761.38 R5.1 ; R5.1@475.98,1839.69 554.29,1839.69 ; R5.1@481.86,1833.81 cw(c496.04,1819.63) 496.04,1839.69 cw(c496.04,1859.74) R5.1@481.86,1845.56 ; 674.01,1820.99 U1.2@720,1754.29 ; 698.9,1796.1 cw(c657.1,1754.29) U1.2@716.22,1754.29 ; 708.3,1783.85 U1.2@720,1754.29 ; U1.2 720,1775 ; U1.2@720,1754.29 720,1775 ; U1.2@720,1754.29 720,1775
NetQ2_1: Q2.1 R2.1 | length 469.2
  Top Layer w30: R2.1 360.12,805 406.5,851.38 ; R2.1@350.31,805.98 406.5,851.38 ; R2.1@350.31,809.29 ccw(c350.31,843.32) 374.38,819.26 ; Q2.1@437.6,1034.96 437.6,947.44 ; Q2.1 437.6,947.44 ; 406.5,851.38 406.5,916.34 437.6,947.44
NetQ2_3: Q2.3 R6.1 U2.2 | length 863
  Top Layer w20: R6.1@469.13,1288.81 cw(c454.94,1274.63) 475,1274.63 cw(c495.05,1274.63) R6.1@480.87,1288.81 ; Q2.3 475,1289.69 480,1294.69 640.31,1294.69 705,1230 U2.2 ; Q2.3@475,1155.04 475,1228.82 ; 475,1216.38 R6.1 ; R6.1@475.98,1294.69 554.29,1294.69 ; R6.1@481.86,1288.81 cw(c496.04,1274.63) 496.04,1294.69 cw(c496.04,1314.74) R6.1@481.86,1300.56 ; 649.8,1285.2 705,1219.29 696.53,1236.78 ; 690.98,1244.02 cw(c666.24,1219.29) U2.2@701.22,1219.29
NetQ3_1: Q3.1 R3.1 | length 463.9
  Top Layer w30: R3.1 432.6,582.72 Q3.1 ; R3.1@358.84,656.47 Q3.1@432.6,581.61 ; Q3.1@431.84,582.39 350.31,664.02 Q3.1@432.26,583.05
NetQ3_3: Q3.3 R7.1 U3.2 | length 774.9
  Top Layer w20: R7.1@460.11,793.81 cw(c436.23,769.93) 470,769.93 ; 468.85,778.67 R7.1@465.98,799.69 ; Q3.3 470,794.69 475,799.69 605.31,799.69 635,770 655,770 695,730 ; Q3.3@470,680.04 470,753.82 ; 470,720.7 R7.1@465.98,799.69 ; R7.1@471.86,793.81 cw(c486.04,779.63) 486.04,799.69 cw(c486.04,819.74) R7.1@471.86,805.56 ; 544.29,799.69 R7.1@465.98,799.69 ; U3.2 695,730 ; U3.2@695,699.29 695,730
NetQ4_1: Q4.1 R4.1 | length 674.7
  Top Layer w30: 350.31,410.71 R4.1@350.31,519.02 ; R4.1 350.31,183.07 ; 411.2,122.19 ccw(c427.6,138.59) Q4.1@427.6,115.39 ; Q4.1 350.31,183.07 ; Q4.1@427.6,116.61 350.31,183.07
NetQ4_3: Q4.3 R8.1 U4.2 | length 607.2
  Top Layer w30: Q4.3 465,268.7 ; Q4.3@465,215.04 465,268.7 ; R8.1@469.02,339.69 465,268.7 ; R8.1 465,334.69 465,268.7 ; U4.2 700,224.21 ; U4.2@700,189.29 700,224.21 ; 465,268.7 655.51,268.7 700,224.21
NetQ5_1: Q5.1 R13.2 R17.2 | length 712.4
  Top Layer w20: R13.2@820.32,1644.02 R17.2@898.56,1640.94 ; R13.2 905.32,1645 R17.2 R17.2@917.09,1647.4 ; R13.2@826.19,1639.13 cw(c840.37,1624.94) 840.37,1645 cw(c840.37,1665.06) R13.2@826.19,1650.87 ; R13.2@830.25,1645 909.02,1640.32 886.98,1643.77 ; 877.65,1645 cw(c877.65,1608.95) R17.2@903.14,1634.44 ; R17.2@916.34,1640.79 989.96,1647.4 R17.2@917.09,1647.4 ; R17.2@916.86,1634.44 cw(c948.15,1603.15) 948.15,1647.4 ; 936.69,1645.89 910.98,1640.32 Q5.1@990.51,1647.4 ; Q5.1 R17.2@917.09,1647.4
NetQ5_3: Q5.3 Q9.2 R21.1 | length 1180.9
  Top Layer w20: Q5.3 R21.1@1179.69,1610 ; Q5.3@1100.71,1610 1179.02,1609.69 1110.04,1610 R21.1@1179.69,1610 ; 1158.2,1610 cw(c1158.2,1588.87) R21.1@1173.14,1603.81 ; 1159.72,1610 ccw(c1159.72,1628.98) R21.1@1173.14,1615.56 ; R21.1@1172.72,1601.42 ccw(c1212.35,1641.05) 1212.35,1585 ; R21.1@1180.98,1601.38 cw(c1180.98,1583.7) R21.1@1193.49,1596.2 ; R21.1@1186.86,1615.56 ccw(c1260.63,1689.34) Q9.2@1260.63,1585 ; R21.1@1189.29,1609.69 ccw(c1211.72,1609.69) R21.1@1195.86,1593.82 ; 1197.84,1586.91 R21.1@1180.98,1609.69 ; 1233.63,1588.55 R21.1@1180.98,1609.69 ; Q9.2@1256.78,1586.12 R21.1@1180.98,1609.69 ; Q9.2@1267.82,1585 R21.1@1180.98,1609.69 ; Q9.2 1204.69,1585 ; R21.1@1179.69,1610 R21.1 1204.69,1585 ; R21.1@1180.98,1609.69 1208.47,1598.98 Q9.2@1260.98,1585 ; R21.1@1180.98,1609.69 1204.69,1585 ; R21.1@1180.98,1609.69 Q9.2@1260.98,1585 ; R21.1@1180.98,1609.69 1204.69,1585 ; R21.1@1180.98,1609.69 1204.69,1585 ; 1204.69,1585 Q9.2@1260.98,1585
NetQ6_1: Q6.1 R14.2 R18.2 | length 659.8
  Top Layer w20: R14.2 R18.2 1142.6,1137.09 Q6.1 ; R14.2@946.19,1124.13 cw(c960.37,1109.94) 960.37,1130 cw(c960.37,1150.06) R14.2@946.19,1135.87 ; R18.2@1142.6,1141.18 1142.6,1214.96 R18.2@1148.77,1141.28 ; 1142.6,1168.15 ccw(c1186.85,1168.15) R18.2@1155.56,1136.86 ; Q6.1@1142.6,1210.54 1149.68,1130.98 1144.11,1156.69 ; R18.2@1143.81,1124.13 ccw(c1129.63,1109.94) 1129.63,1130 ccw(c1129.63,1150.06) R18.2@1143.81,1135.87
NetQ6_3: Q6.3 Q9.4 R22.1 | length 667.1
  Top Layer w20: R22.1@1174.13,1468.81 cw(c1159.94,1454.63) 1180,1454.63 cw(c1200.06,1454.63) R22.1@1185.87,1468.81 ; Q6.3@1175,1324.21 1180,1329.21 R22.1 R22.1@1190.31,1485 ; Q6.3@1180,1335.04 1180,1408.82 ; R22.1@1186.86,1468.81 cw(c1225.94,1429.73) 1225.94,1485 ; R22.1@1187.39,1475.49 1260.98,1485 R22.1@1190.31,1485 ; 1211.64,1483.12 1180.98,1474.69 Q9.4@1262.59,1485 ; Q9.4 R22.1@1190.31,1485
NetQ7_1: Q7.1 R15.2 R19.2 | length 712.3
  Top Layer w20: R15.2 865.63,645.32 ; R15.2@815.32,595.98 865.63,645.32 ; R15.2@815.32,604.29 ccw(c815.32,626.72) R15.2@831.18,610.86 ; R15.2@823.62,595.98 cw(c841.3,595.98) R15.2@828.8,608.49 ; R19.2@923.14,639.44 ccw(c908.96,625.26) 908.96,645.32 ccw(c908.96,665.37) R19.2@923.14,651.19 ; R19.2@929.02,645.32 865.63,645.32 ; R19.2@936.86,639.44 cw(c974.42,601.88) 974.42,655 ; 960.67,653.19 R19.2@930.98,645.32 ; 984.56,655 cw(c984.56,637) Q7.1@997.29,649.73 ; Q7.1 Q7.1@1008.19,655 ; 865.63,645.32 R19.2 R19.2@939.68,655 ; R19.2@930.98,645.32 999.96,652.4 R19.2@939.68,655 ; R19.2@930.98,645.32 Q7.1@1008.19,655 ; R19.2@939.68,655 Q7.1@1008.19,655
NetQ7_3: Q7.3 Q10.2 R23.1 | length 737.8
  Top Layer w20: Q7.3 R23.1@1189.69,615 ; Q7.3@1110.71,615 1189.02,614.69 1120.04,615 R23.1@1189.69,615 ; 1168.2,615 cw(c1168.2,593.87) R23.1@1183.14,608.81 ; 1169.72,615 ccw(c1169.72,633.98) R23.1@1183.14,620.56 ; R23.1@1196.86,620.56 ccw(c1246.49,670.19) 1246.49,600 ; 1228.33,602.39 R23.1@1190.98,614.69 ; Q10.2@1277.19,600 R23.1@1190.98,614.69 ; Q10.2 R23.1@1204.69,600 ; R23.1@1189.69,615 R23.1 R23.1@1204.69,600 ; R23.1@1190.98,614.69 1260.98,600 R23.1@1204.69,600
NetQ8_1: Q8.1 R16.2 R20.2 | length 633.7
  Top Layer w20: R16.2 R20.2 R20.2@1147.6,162.09 ; R16.2@961.19,149.13 cw(c975.37,134.94) 975.37,155 cw(c975.37,175.06) R16.2@961.19,160.87 ; 1147.6,193.15 ccw(c1191.85,193.15) R20.2@1160.56,161.86 ; Q8.1@1147.6,235.47 1154.68,155.98 1149.11,181.69 ; Q8.1 R20.2@1147.6,162.09 ; R20.2@1148.81,149.13 ccw(c1134.63,134.94) 1134.63,155 ccw(c1134.63,175.06) R20.2@1148.81,160.87 ; R20.2@1154.65,156.39 1147.6,229.96 R20.2@1147.6,162.09
NetQ8_3: Q8.3 Q10.4 R24.1 | length 646.4
  Top Layer w20: Q8.3 1185,474.69 R24.1 1224.69,479.69 ; Q8.3@1185,350.04 1185,423.82 ; 1185,400.69 1189.02,479.69 1186.15,458.67 ; 1185,449.94 cw(c1218.77,449.94) R24.1@1194.89,473.81 ; R24.1@1190.98,479.69 1224.69,479.69 ; R24.1@1196.86,473.81 cw(c1211.04,459.63) 1211.04,479.69 cw(c1211.04,499.74) R24.1@1196.86,485.56 ; 1227.25,482.25 cw(c1260.98,448.51) Q10.4@1260.98,496.22 ; 1237.13,489.83 Q10.4@1260.98,500 ; Q10.4 1245,500 ; 1224.69,479.69 Q10.4@1260.98,500 ; 1224.69,479.69 1245,500 ; 1245,500 Q10.4@1260.98,500 ; 1245,500 Q10.4@1260.98,500
NetR13_1: R13.1 U1.3 | length 370.6
  Top Layer w20: R13.1@753.81,1651.86 ccw(c714.73,1690.94) 770,1690.94 ; R13.1 R13.1@770,1655.31 ; 768.12,1676.64 R13.1@759.69,1645.98 ; U1.3@770,1727.37 R13.1@759.69,1645.98 ; U1.3 R13.1@770,1655.31 ; R13.1@759.69,1645.98 770,1710.98 R13.1@770,1655.31
NetR14_1: R14.1 U2.3 | length 246
  Top Layer w20: U2.3@755,1175.98 755,1145 ; U2.3 755,1145 ; R14.1@873.81,1124.13 ccw(c859.63,1109.94) 859.63,1130 ccw(c859.63,1150.06) R14.1@873.81,1135.87 ; R14.1 770,1130 755,1145
NetR15_1: R15.1 U3.3 | length 352.6
  Top Layer w20: 745,639.42 ccw(c798.12,639.42) R15.1@760.56,601.86 ; U3.3@745,676.83 R15.1@754.69,595.98 ; U3.3 R15.1@745,604.69 ; 746.81,625.67 R15.1@754.69,595.98 ; R15.1 R15.1@745,604.69 ; R15.1@745,604.69 745,655.98 R15.1@754.69,595.98
NetR16_1: R16.1 U4.3 | length 369.8
  Top Layer w20: U4.3@750,145.98 750,106.3 ; U4.3 750,106.3 ; R16.1@888.81,148.14 cw(c874.63,133.96) 894.69,133.96 cw(c914.74,133.96) R16.1@900.56,148.14 ; R16.1@894.69,154.02 894.69,121.06 ; R16.1 894.69,121.06 ; 750,106.3 773.62,82.68 856.3,82.68 894.69,121.06
"VCC 5V": P1.1 R5.2 R6.2 R7.2 R8.2 R9.1 R10.1 R11.1 R12.1 U1.4 U1.8 U2.4 U2.8 U3.4 U3.8 U4.4 U4.8 | length 10833.6
  Top Layer w20: R7.2@457.72,868.58 cw(c477.96,848.34) R7.2@477.96,876.97 ; R7.2 481.65,876.97 v1(579.72,876.97) ; R8.2 544.57,400.32 ; R8.2@470.98,400.32 544.57,400.32 ; R7.2@471.86,854.44 cw(c526.24,800.06) 526.24,876.97 ; R6.2@475.98,1355.32 527.05,1402.36 ; R6.2@475.98,1363.62 ccw(c475.98,1393.37) 497.02,1372.34 ; R5.2@475.98,1900.32 517.05,1937.36 ; R5.2@475.98,1908.62 ccw(c475.98,1938.37) 497.02,1917.34 ; R8.2@476.86,394.44 cw(c491.04,380.26) 491.04,400.32 cw(c491.04,420.37) R8.2@476.86,406.19 ; R6.2@480,1355.32 527.05,1402.36 ; R5.2@480,1900.32 517.05,1937.36 ; 506.34,874.35 465.98,860.32 v1@555.76,876.97 ; 541.64,1402.36 ccw(c541.64,1442.61) v1@570.1,1414.15 ; 547.35,1402.36 cw(c547.35,1370.18) v1@570.1,1392.94 ; v1@559.8,370.08 ccw(c523.59,370.08) 549.2,395.69 ccw(c574.8,421.29) v1@574.8,385.08 ; v1@562.5,361.5 544.57,400.32 ; v1@569.12,866.36 ccw(c543.51,840.76) 543.51,876.97 ccw(c543.51,913.18) v1@569.12,887.58 ; v1@574.88,862.77 552.88,878.2 ; v1@574.88,891.16 552.88,875.73 ; v1@574.95,1417.4 555.68,1401.27 ; v1@575.84,385.04 U4.8 ; v1@576.07,370.08 U4.8 ; v1@576.2,862.39 552.88,875.73 ; v1@576.2,891.55 552.88,878.2 ; v1@576.35,355.16 U4.8@647.72,370.08 ; v1@576.35,385 U4.8@647.72,370.08 ; v1@576.46,891.61 493.02,865.33 ; v1@576.69,1389.09 552.06,1403.73 ; v1@576.75,355.21 U4.8 ; v1@576.88,1418.05 552.06,1403.73 ; v1@577.55,1388.88 555.68,1401.27 ; v1@578.32,355.5 601.64,368.84 ; v1@578.32,384.66 601.64,371.31 ; v1@578.29,1418.35 527.05,1402.36 ; v1@578.4,862.03 494.72,876.97 v1@578.4,891.91 ; v1@578.94,1388.65 527.05,1402.36 ; v1@579.65,355.88 601.64,371.31 ; v1@579.65,384.28 601.64,368.84 ; v1@580.21,891.96 U3.8 ; v1@580.44,861.99 493.02,865.33 ; v1@581.6,862.09 U3.8@639.61,876.97 ; v1@581.6,891.85 U3.8@639.61,876.97 ; v1@581.99,1388.6 U2.8 ; v1@582.46,1418.44 U2.8 ; v1@582.66,862.26 U3.8 ; v1@583.25,862.39 606.56,875.73 ; v1@583.25,891.55 606.56,878.2 ; v1@583.39,382.38 544.57,400.32 ; v1@583.87,1388.88 605.74,1401.27 ; v1@584.57,862.77 606.56,878.2 ; v1@584.57,891.16 606.56,875.73 ; v1@584.54,1418.05 609.36,1403.73 ; v1@584.73,1389.09 609.36,1403.73 ; v1@585.41,359.47 cw(c611.02,333.87) 611.02,370.08 cw(c611.02,406.29) v1@585.41,380.69 ; v1@586.46,1417.4 605.74,1401.27 ; v1@590.33,866.36 cw(c615.94,840.76) 615.94,876.97 cw(c615.94,913.18) v1@590.33,887.58 ; v1@591.32,1392.94 cw(c614.07,1370.18) 614.07,1402.36 ; v1@591.32,1414.15 ccw(c619.77,1442.61) 619.77,1402.36 ; 596.22,1937.36 U1.8 ; R11.1@608.81,993.14 cw(c594.63,978.96) 614.69,978.96 cw(c634.74,978.96) R11.1@620.56,993.14 ; R11.1@614.69,999.02 614.69,953.23 ; R11.1 614.69,953.23 ; R12.1@619.32,463.61 cw(c605.14,449.43) 625.2,449.43 cw(c645.25,449.43) R12.1@631.07,463.61 ; 622.85,876.97 ccw(c622.85,904.51) U3.8@642.33,885.03 ; R10.1@623.81,1498.14 cw(c609.63,1483.96) 629.69,1483.96 cw(c649.74,1483.96) R10.1@635.56,1498.14 ; R12.1@625.2,469.49 625.2,431.89 ; R12.1 625.2,431.89 ; 625.19,942.73 cw(c586.47,904.02) U3.8@641.22,904.02 ; R9.1@628,2029.35 ccw(c659.4,2028.45) 637.19,2006.24 ; R10.1@629.69,1504.02 629.69,1454.45 ; R10.1 629.69,1454.45 ; 629.98,877.91 U3.8 ; R9.1@633.81,2023.14 cw(c619.63,2008.96) 639.69,2008.96 cw(c659.74,2008.96) R9.1@645.56,2023.14 ; 633.89,931.39 U3.8@645,904.02 ; 634.31,422.78 cw(c605.54,394.02) U4.8@646.22,394.02 ; 635.36,370.08 ccw(c635.36,387) U4.8@647.33,375.03 ; R9.1 639.69,2003.74 ; 640.77,414.36 650,394.02 625.2,431.89 ; 644.93,1439.2 cw(c629.74,1424.02) U2.8@651.22,1424.02 ; U3.8@645,860.71 645,830 ; R9.1@647.99,2028.78 ccw(c723.2,2026.63) 670,1973.43 ; 653.36,1990.07 cw(c622.31,1959.02) U1.8@666.22,1959.02 ; U4.8@653.78,350.71 ccw(c695.51,350.71) 666,321.2 ; U2.8@655,1380.71 655,1350 ; U2.8@655,1424.02 629.69,1454.45 ; 656.99,1990.88 R9.1@639.69,2029.02 ; 659.37,329.85 650,350.71 698.82,288.39 ; 660.34,1980.97 U1.8@670,1959.02 ; U1.8@670,1915.71 670,1885 ; U3.4 795,785 770,810 665,810 645,830 ; U3.4@795,699.29 795,773.07 ; U4.4 800,228.54 ; U4.4@800,189.29 800,228.54 ; U2.4 805,1275 ; U2.4@805,1219.29 805,1275 ; U1.4 820,1815 ; U1.4@820,1754.29 820,1815 ; 493.02,865.33 v1(579.72,876.97) ; 517.05,1937.36 U1.8 ; 527.05,1402.36 v1(580.71,1403.54) ; 527.05,1402.36 U2.8 ; 544.57,400.32 v1(574.8,370.08) ; 552.06,1403.73 v1(580.71,1403.54) ; 552.88,875.73 v1(579.72,876.97) ; 552.88,878.2 v1(579.72,876.97) ; 555.68,1401.27 v1(580.71,1403.54) ; v1(574.8,370.08) U4.8 ; v1(574.8,370.08) 601.64,371.31 ; v1(574.8,370.08) 601.64,368.84 ; v1(574.8,370.08) U4.8@647.72,370.08 ; v1(579.72,876.97) 606.56,878.2 ; v1(579.72,876.97) 606.56,875.73 ; v1(579.72,876.97) U3.8 ; v1(579.72,876.97) U3.8@639.61,876.97 ; v1(580.71,1403.54) U2.8 ; v1(580.71,1403.54) 609.36,1403.73 ; v1(580.71,1403.54) 605.74,1401.27 ; 614.69,953.23 U3.8@645,904.02 ; 614.69,953.23 645,922.91 ; 625.2,431.89 650,407.09 U4.8 ; 629.69,1454.45 655,1429.13 U2.8 ; U3.8@639.61,876.97 U3.8 ; 639.69,2003.74 U1.8@670,1959.02 ; 639.69,2003.74 R9.1@639.69,2029.02 ; 639.69,2003.74 R9.1@639.69,2029.02 ; 639.69,2003.74 670,1973.43 ; R9.1@639.69,2029.02 U1.8@670,1959.02 ; R9.1@639.69,2029.02 670,1973.43 ; 645,830 U3.8 ; U3.8 645,922.91 ; U3.8@645,904.02 645,922.91 ; U3.8@645,904.02 645,922.91 ; U4.8@647.72,370.08 U4.8 ; U4.8 650,337.2 698.82,288.39 ; 655,1350 U2.8 ; 655,1350 685,1320 760,1320 805,1275 ; 670,1885 U1.8 ; 670,1885 715,1840 795,1840 820,1815 ; U1.8 670,1973.43 ; U1.8@670,1959.02 670,1973.43 ; U1.8@670,1959.02 670,1973.43 ; U1.8@670,1959.02 670,1973.43 ; 698.82,288.39 740.16,288.39 800,228.54
  Top Layer w30: P1.1 320.87,1720.87 320.87,1807.09 414.09,1900.32 ; P1.1@175,1590 ccw(c175,1626.21) 200.61,1600.61 ccw(c226.21,1575) P1.1@190,1575 ; R5.2@474.02,1900.32 414.09,1900.32 ; R5.2@480,1900.32 R5.2 414.09,1900.32
  Bottom Layer w50: P1.1 99.61,1575 71.85,1547.24 71.85,1224.41 152.56,1143.7 578.74,1143.7 578.74,1401.57 v1(580.71,1403.54) ; v1(574.8,370.08) 574.8,872.05 v1(579.72,876.97) ; 574.8,701.43 v1(579.72,876.97) ; 578.74,1228.47 v1(580.71,1403.54) ; 580.71,1051.99 v1(579.72,876.97) ; v1(579.72,876.97) 580.71,877.95 v1(580.71,1403.54)
"VCC  12V": C9.1 C10.1 P1.2 Q9.1 Q9.3 Q10.1 Q10.3 R21.2 R22.2 R23.2 R24.2 | length 6680.1
  Top Layer w20: R21.2 1226.34,1670.32 ; R21.2@1180.98,1670.32 1226.34,1670.32 ; R21.2@1186.86,1664.44 cw(c1201.04,1650.26) 1201.04,1670.32 cw(c1201.04,1690.37) R21.2@1186.86,1676.19 ; R24.2 R24.2@1199.68,550 ; R23.2 1234.68,675.32 ; R23.2@1190.98,675.32 1234.68,675.32 ; R24.2@1196.86,534.44 cw(c1234.42,496.88) 1234.42,550 ; R23.2@1196.86,669.44 cw(c1211.04,655.26) 1211.04,675.32 cw(c1211.04,695.37) R23.2@1196.86,681.19 ; 1220.67,548.19 R24.2@1190.98,540.32 ; Q10.1@1260.98,650 1234.68,675.32 ; Q9.1@1260.98,1635 1226.34,1670.32 ; Q10.3@1271.98,550 R24.2@1190.98,540.32 ; Q10.3 R24.2@1199.68,550 ; Q10.1 1260,650 1234.68,675.32 ; Q9.1 1261.65,1635 1226.34,1670.32 ; R24.2@1190.98,540.32 1260.98,550 R24.2@1199.68,550
  Top Layer w30: R22.2 R22.2@1180.32,1535 ; Q10.3 1394.8,550 ; Q10.1 1368.7,650 ; Q9.1 1373.19,1635 ; Q10.3@1304.29,550 1394.8,550 ; Q10.1@1304.29,650 1368.7,650 ; Q9.3@1304.29,1535 1372.6,1535 ; Q9.1@1304.29,1635 1373.19,1635 ; 1372.6,1546.26 1372.6,1535 ; 1374.02,1635.83 1373.19,1635 ; 1395,550.2 1394.8,550 ; R22.2@1180.32,1535 1260.98,1535 1180.98,1535.32 Q9.3 ; R22.2@1180.32,1535 Q9.3 ; Q9.3 1372.6,1535 ; 1368.7,650 1394.8,623.9 1394.8,550
  Top Layer w50: 1372.6,1546.26 1374.02,1547.68 1374.02,1635.83 ; C10.1@1374.02,1783.86 1374.02,1635.83 ; C10.1 1374.02,1635.83 ; C9.1 1395,550.2 C9.1@1395,420.94
  Bottom Layer w60: P1.2 247.64,1475 645.67,1873.03 v1@1303.15,1873.03 ; 1096.33,1873.03 v1(1302.17,1866.14) ; 1304.13,371.25 ccw(c1352.55,371.25) v3@1318.31,337.02 ; 1304.13,387.44 cw(c1345.83,387.44) v1@1316.35,416.92 ; 1304.13,439.33 ccw(c1345.83,439.33) v1@1316.35,409.85 ; 1304.13,557.14 v3(1321.85,340.55) ; 1304.13,622.78 v1(1319.88,413.39) ; v1(1302.17,1866.14) v1(1304.13,1789.37) ; v1(1302.17,1866.14) v1@1303.15,1790.35 ; v1@1303.15,1790.35 v1(1304.13,1789.37) ; v1@1303.15,1790.35 v1@1303.15,1873.03 ; v1@1303.15,1873.03 v1(1304.13,1789.37) ; 1304.13,358.27 v1(1319.88,413.39) ; 1304.13,358.27 v1(1304.13,1789.37) ; 1304.13,358.27 v3(1321.85,340.55) ; v1(1319.88,413.39) v3(1321.85,340.55)
copper on no net:
  other v2: 118.11,118.11 2047.24,118.11 118.11,2047.24 2047.24,2047.24

## Polygon pours and split planes (outlines as drawn)
GND on Top Layer "Bottom-AGND" (solid, remove dead copper, pour order 4): 0,2165 2165,2165 2165,0 0,0
GND on Bottom Layer "Bottom-AGND" (solid, remove dead copper, pour order 6): 0,2165.35 0.35,2165 2165,2165 2165,0 0,0

## Keep-outs
Keep-Out Layer:
  lines w11.81: 0,2165 2165.35,2165 ; 0,2165.35 0,0 2165.35,0 ; 2165,0 2165,2165

## Other copper
Top Layer:
  rectangle net "VCC  12V": 1298.23,290.35 1425.2,454.72
  rectangle net "VCC  12V": 1278.54,1750 1405.51,1914.37

## Silkscreen, mask and mechanical layers (free items; w line width, h text height)
Top Overlay:
  lines w11.81: 128.94,424.21 201.77,351.38 201.77,349.41 ; 210.63,218.5 345.47,218.5 346.46,219.49 ; 210.63,362.2 345.47,362.2 346.46,361.22 ; 211.61,142.72 345.47,142.72 346.46,143.7 ; 212.6,287.4 345.47,287.4 346.46,286.42 ; 210.63,67.91 211.61,68.9 346.46,68.9 346.46,438.98 210.63,438.98 210.63,67.91
  text "+5V" at 250.98,1700.79 h65 r270
  text "锁.1" at 1918.31,1596.46 h65 r90
  text "+12V" at 253.94,1539.37 h65 r270
  text "GND" at 251.97,1354.33 h65 r270
  text "锁.2" at 1920.28,1207.68 h65 r90
  text "电控锁驱动板 V0.1" at 1020.67,980.32 h75
  text "2018.4.12" at 1213.58,892.72 h60
  text "锁.3" at 1920.28,845.47 h65 r90
  text "锁.4" at 1920.28,485.24 h65 r90
  text "锁1" at 234.25,384.84 h50
  text "锁2" at 232.28,309.06 h50
  text "锁3" at 233.27,244.09 h50
  text "锁4" at 235.24,171.26 h50
  text "GND" at 239.17,90.55 h50